# Altium PCB 6S1P-3V-N160铝.PcbDoc
Units mm, origin at the board's own origin, x right, y up, seen from the top; angles counter-clockwise.
Board outline 74.99 x 72.5 mm, 2 copper layers (Top Layer, Bottom Layer); 9 components, 8 nets, 26 pads, 0 vias.
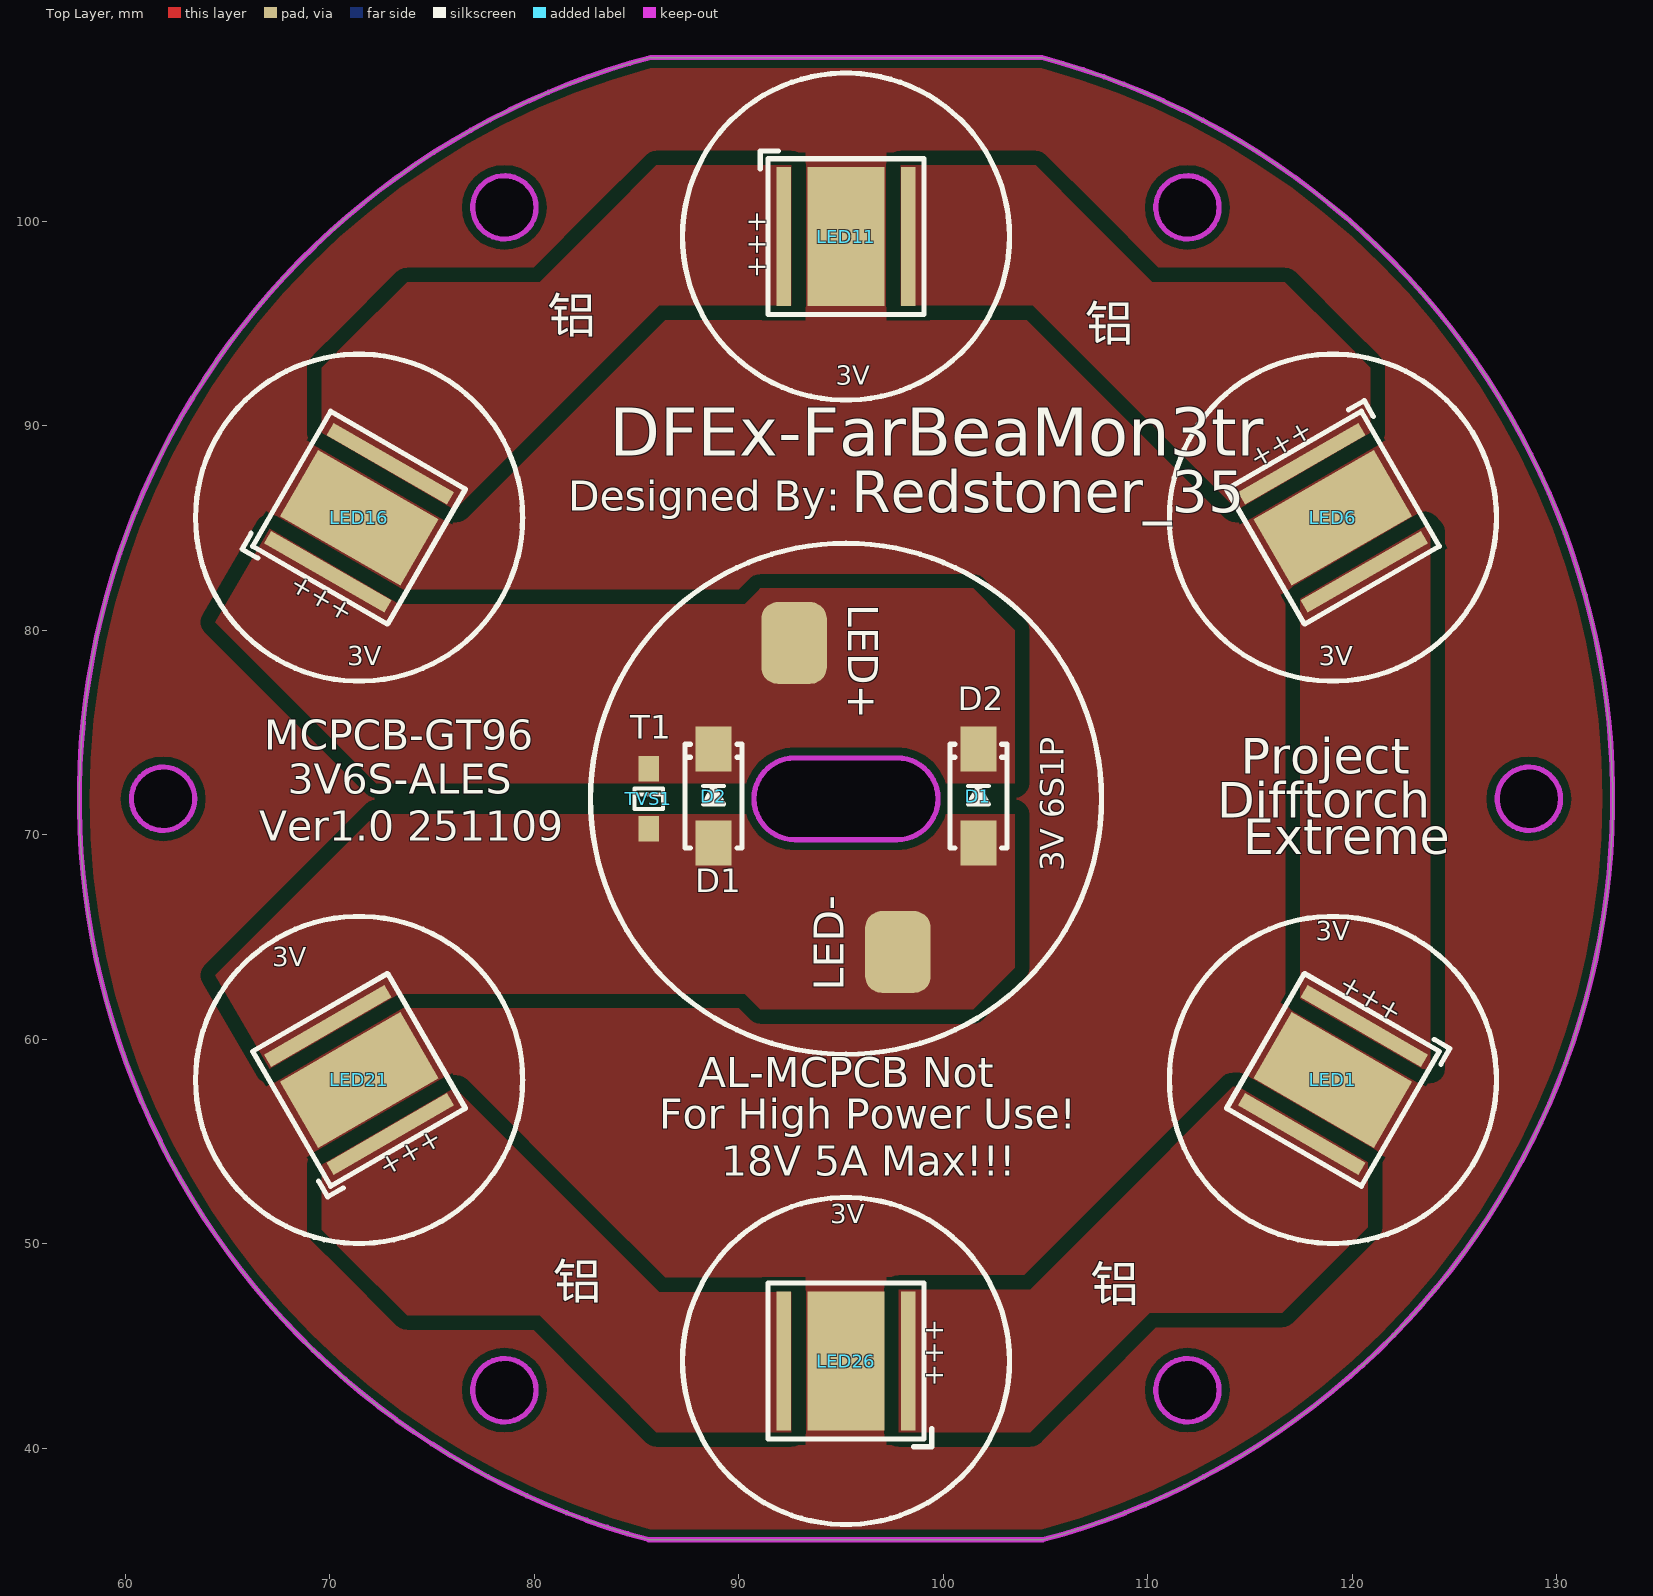
[diagram p0: Top Layer view]
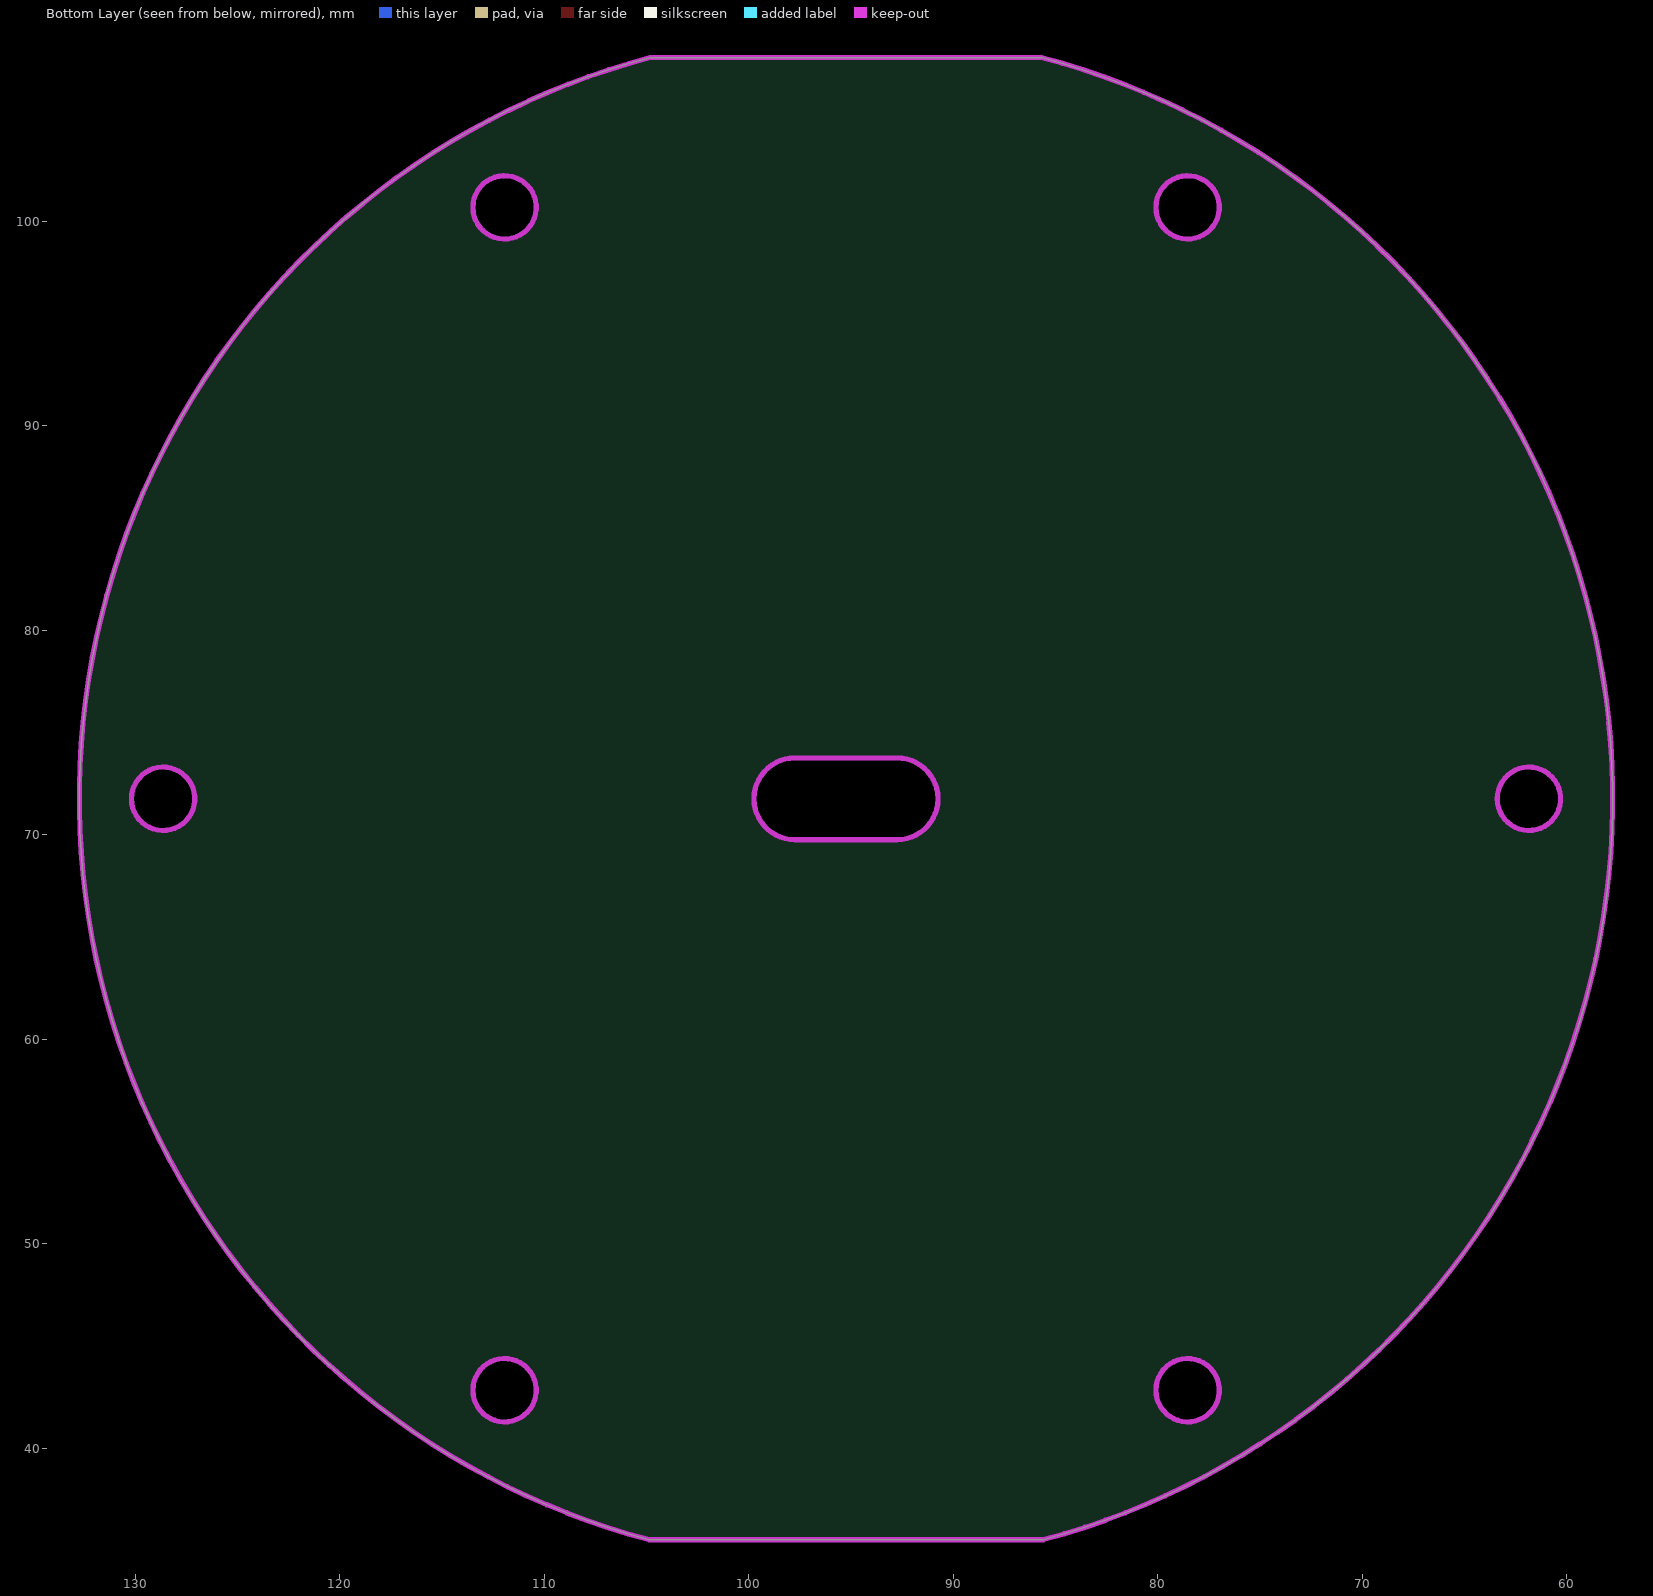
[diagram p1: Bottom Layer view, seen from below]
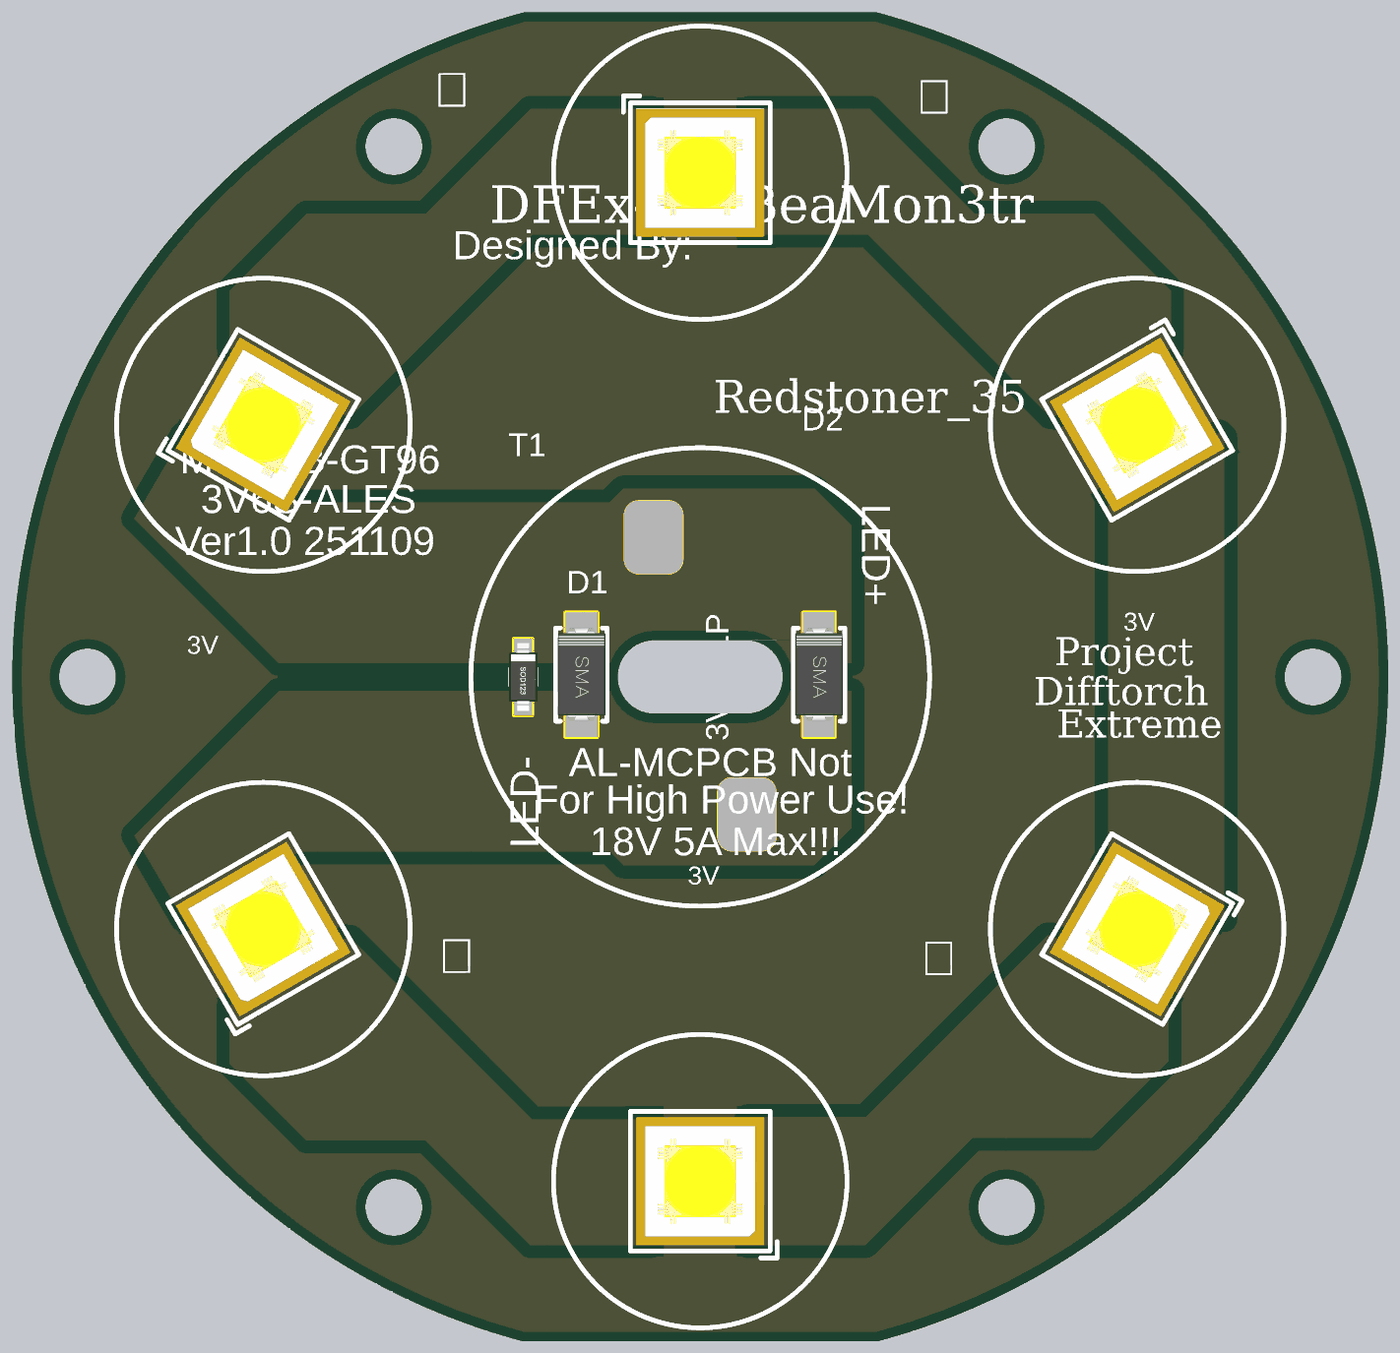
[diagram p2: 3D render of the assembled board from above, using the file's embedded part models]

## Layer stack, top to bottom
Top Solder: solder mask 0.0102, Solder Resist, Dk 3.5
Top Layer: signal copper 0.0356
Dielectric 1: dielectric 0.32, FR-4, Dk 4.8
Bottom Layer: signal copper 0.0356
Bottom Solder: solder mask 0.0102, Solder Resist, Dk 3.5

## Board outline
85.597,35.519 cw(c95.25,71.755) 85.7,108.019 85.7,108.01 104.832,108.01 cw(c95.25,71.755) 104.888,35.515
cut-out: 76.999,42.828 cw(c78.549,42.828) 78.549,44.378 cw(c78.549,42.828) 80.099,42.828 cw(c78.549,42.828) 78.549,41.278 cw(c78.549,42.828)
cut-out: 110.401,42.828 ccw(c111.951,42.828) 111.951,41.278 ccw(c111.951,42.828) 113.501,42.828 ccw(c111.951,42.828) 111.951,44.378 ccw(c111.951,42.828)
cut-out: 127.102,71.755 ccw(c128.652,71.755) 128.652,70.205 ccw(c128.652,71.755) 130.202,71.755 ccw(c128.652,71.755) 128.652,73.305 ccw(c128.652,71.755)
cut-out: 110.401,100.682 ccw(c111.951,100.682) 111.951,99.132 ccw(c111.951,100.682) 113.501,100.682 ccw(c111.951,100.682) 111.951,102.232 ccw(c111.951,100.682)
cut-out: 78.549,99.132 cw(c78.549,100.682) 76.999,100.682 cw(c78.549,100.682) 78.549,102.232 cw(c78.549,100.682) 80.099,100.682 cw(c78.549,100.682)
cut-out: 61.848,70.205 cw(c61.848,71.755) 60.298,71.755 cw(c61.848,71.755) 61.848,73.305 cw(c61.848,71.755) 63.398,71.755 cw(c61.848,71.755)
cut-out: 92.75,69.755 97.75,69.755 ccw(c97.75,71.755) 97.75,73.755 92.75,73.755 ccw(c92.75,71.755)

## Design rules (kind name [scope] priority, off if disabled: settings)
Clearance Clearance_1 [InNet('LEDH') vs InNetClass('LEDP')] p1: gap=0.7
Clearance [All] p2: gap=0.381
PolygonConnect [All] p1: connectstyle=Direct reliefconductorwidth=0.254 reliefentries=4 polygonreliefangle="90 Angle" airgapwidth=0.254
RoutingVias [All] p1: holewidth=0.711 width=1.27 viastyle="Through Hole" minholewidth=0.711 minwidth=1.27 maxholewidth=0.711 maxwidth=1.27
SolderMaskExpansion [All] p1: expansion=0.102
Width [All] p1: maxlimit=0.254 minlimit=0.254 preferedwidth=0.254
30 further rules are at their usual default settings.

## Classes and differential pairs
net class LEDP: 3V 6V 9V 12V 15V 18V GND

## Components (designator, comment, footprint, x,y, rotation, side; value= is the part's Value field where it differs from the comment)
D1 "SS54" SMA 101.727,71.882 r90 top
D2 "SS54" SMA 88.773,71.882 r90 top
LED1 "FV7012I" NBT160-7070-OLD 119.066,58.005 r60 top
LED6 "FV7012I" NBT160-7070-OLD 119.066,85.505 r120 top
LED11 "FV7012I" NBT160-7070-OLD 95.25,99.255 r180 top locked
LED16 "FV7012I" NBT160-7070-OLD 71.434,85.505 r240 top locked
LED21 "FV7012I" NBT160-7070-OLD 71.434,58.005 r300 top
LED26 "FV7012I" NBT160-7070-OLD 95.25,44.255 r0 top locked
TVS1 "SMF24CA" SOD-123 85.598,71.755 r270 top

## Footprints (in the part's own frame and the unit in brackets; to place one, negate y for a bottom-side part, rotate by r counter-clockwise, add the part's x,y. Pads: shape width x height; smd on the part's side, far side on the other; paste and mask are expansions set on the pad)
NBT160-7070-OLD [mm] "逸尘NBT160-旧版本热焊盘"
  rect 3.75x6.8 smd mask+0.03: 0(0,0)
  rect 0.7x6.8 smd mask+0.03: 1(-3.05,0) 2(3.05,0)
  silkscreen extent -3.81,-4.19 4.19,3.81, body extent -3.5,-3.51 3.5,3.49, height 1.02
SMA [mm] "4.5x2.6*2.2mm（长宽高，不包括引脚）"
  rect 2.2x1.75 smd: 1(-2.3,0) 2(2.3,0)
  silkscreen extent -2.54,-1.4 2.54,1.4, body extent -2.53,-1.3 2.58,1.3, height 2.15
SOD-123 [mm]
  rect 1.25x1 smd: 1(1.475,0) 2(-1.475,0)
  silkscreen extent -0.5,-0.7 0.5,0.7, body extent -1.85,-0.77 1.85,0.78, height 1.35

## Free pads (board coordinates)
  rrect50% 3.2x4 smd mask+0.03: 1(92.71,79.375) 1(97.79,64.262)

## Nets (pads, with @x,y where several pads share a name; then routed paths per layer and width w, separated by ;. In a path a pad name is that pad's centre, name@x,y a point inside that pad or via, vN(x,y) a via of type N, cw(c..) or ccw(c..) an arc to the next point about the centre after c; other vN are vias at no path point)
3V: LED21.2 LED26.1
6V: LED1.1 LED26.2
9V: LED1.2 LED6.1
12V: LED6.2 LED11.1
15V: LED11.2 LED16.1
18V: D1.2 D2.2 LED16.2 pad.1@92.71,79.375 TVS1.2
GND: D1.1 D2.1 LED21.1 pad.1@97.79,64.262 TVS1.1
LEDH: LED1.0 LED6.0 LED11.0 LED16.0 LED21.0 LED26.0

## Polygon pours and split planes (outlines as drawn)
LEDH on Top Layer "Component Side-No Net 1" (solid, remove dead copper, pour order 31): 44.196,26.289 45.212,25.273 157.226,25.273 157.226,116.84 146.812,127.254 145.796,128.27 22.987,128.27
9V on Top Layer "Component Side-No Net 1" (solid, remove dead copper, pour order 29): 117.475,81.534 117.475,61.976 123.444,58.547 123.825,58.547 123.825,84.836 123.571,85.09
15V on Top Layer "Component Side-No Net 1" (solid, remove dead copper, pour order 24): 92.583,102.743 92.583,95.885 86.106,95.885 82.296,92.075 76.2,85.979 76.073,85.979 75.946,85.979 69.596,89.662 69.596,92.837 69.85,93.091 70.866,94.107 73.787,97.028 78.74,97.028 80.264,97.028 83.439,100.203 85.979,102.743 88.138,102.743
12V on Top Layer "Component Side-No Net 1" (solid, remove dead copper, pour order 24): 97.917,102.743 97.917,95.885 104.394,95.885 108.204,92.075 114.3,85.979 114.427,85.979 114.554,85.979 120.904,89.662 120.904,92.837 120.65,93.091 119.634,94.107 116.713,97.028 111.76,97.028 110.236,97.028 107.061,100.203 104.521,102.743 102.362,102.743
6V on Top Layer "Component Side-No Net 1" (solid, remove dead copper, pour order 24): 97.79,40.767 97.79,47.752 104.267,47.752 108.077,51.562 114.173,57.658 114.3,57.658 114.427,57.658 120.777,53.975 120.777,50.8 120.523,50.546 119.507,49.53 116.586,46.609 111.633,46.609 110.109,46.609 106.934,43.434 104.394,40.894 104.267,40.767
3V on Top Layer "Component Side-No Net 1" (solid, remove dead copper, pour order 24): 92.583,40.767 92.583,47.625 86.106,47.625 82.296,51.435 76.2,57.531 76.073,57.531 75.946,57.531 69.596,53.848 69.596,50.673 69.85,50.419 70.866,49.403 73.787,46.482 78.74,46.482 80.264,46.482 83.439,43.307 85.979,40.767 88.138,40.767
GND on Top Layer "Component Side-No Net 1" (solid, remove dead copper, pour order 21): 67.056,58.547 73.394,62.23 90.297,62.23 90.932,61.595 91.059,61.468 99.314,61.468 101.473,61.468 102.87,62.865 103.505,63.5 103.505,70.993 85.344,70.993 85.09,70.993 75.565,70.993 72.263,70.993 64.389,63.119
18V on Top Layer "Component Side-No Net 1" (solid, remove dead copper, pour order 21): 67.056,84.963 73.394,81.28 90.297,81.28 90.932,81.915 91.059,82.042 99.314,82.042 101.473,82.042 102.87,80.645 103.505,80.01 103.505,72.517 85.344,72.517 85.09,72.517 75.565,72.517 72.263,72.517 64.389,80.391

## Keep-outs
Keep-Out Layer:
  circle w0.254: c128.652,71.755 r1.55
  circle w0.254: c111.951,42.828 r1.55
  circle w0.254: c78.541,42.828 r1.55
  circle w0.254: c61.848,71.755 r1.55
  circle w0.254: c78.541,100.682 r1.55
  circle w0.254: c111.951,100.682 r1.55
  lines w0.254: 85.597,35.515 104.888,35.515 ccw(c95.25,71.755) 104.832,108.01 85.7,108.01 ; 85.597,35.519 cw(c95.25,71.755) 85.7,108.019 ; 92.75,69.755 cw(c92.75,71.755) 92.75,73.755 97.75,73.755 cw(c97.75,71.755) 97.75,69.755 92.75,69.755

## Silkscreen, mask and mechanical layers (free items; w line width, h text height)
Top Overlay:
  circle w0.254: c95.25,71.755 r12.5
  circle w0.254: c71.434,85.505 r8
  circle w0.254: c71.434,58.005 r8
  circle w0.254: c95.25,44.255 r8
  circle w0.254: c119.066,58.005 r8
  circle w0.254: c119.066,85.505 r8
  circle w0.254: c95.25,99.255 r8
  text "铝" at 80.645,93.98 h3
  text "铝" at 106.934,93.599 h3
  text "3V" at 94.742,91.694 h1.6
  text "DFEx-FarBeaMon3tr" at 83.693,87.757 h4
  text "Designed By:" at 81.661,85.344 h2.5
  text "Redstoner_35" at 95.504,85.09 h3.5
  text "LED+" at 94.869,81.28 h2.5 r270
  text "3V" at 70.866,77.978 h1.6
  text "3V" at 118.364,77.978 h1.6
  text "D2" at 100.711,75.692 h2
  text "T1" at 84.709,74.295 h2
  text "MCPCB-GT96" at 66.802,73.66 h2.5
  text "Project" at 114.554,72.39 h3
  text "3V6S-ALES" at 67.945,71.501 h2.5
  text "Difftorch" at 113.411,70.231 h3
  text "Ver1.0 251109" at 66.548,69.215 h2.5
  text "Extreme" at 114.681,68.453 h3
  text "3V 6S1P" at 106.299,68.199 h2 r90
  text "D1" at 87.884,66.802 h2
  text "3V" at 118.237,64.516 h1.6
  text "3V" at 67.183,63.246 h1.6
  text "LED-" at 95.631,62.357 h2.5 r90
  text "AL-MCPCB Not" at 88.011,57.15 h2.5
  text "For High Power Use!" at 86.106,55.118 h2.5
  text "18V 5A Max!!!" at 89.154,52.832 h2.5
  text "3V" at 94.488,50.673 h1.6
  text "铝" at 80.899,46.736 h3
  text "铝" at 107.188,46.609 h3
Mechanical 1:
  circle w0.254: c78.549,42.828 r3.2
  circle w0.254: c111.951,42.828 r3.2
  circle w0.254: c111.951,100.682 r3.2
  circle w0.254: c78.549,100.682 r3.2
  circle w0.254: c61.848,71.755 r3.2
  circle w0.254: c128.652,71.755 r3.2

## Text inside footprints (layer, text, board x,y; h text height)
LED1: Top Overlay "+++" at 122.706,61.769 h1.65 r150
LED6: Top Overlay "+++" at 117.626,90.539 h1.65 r210
LED11: Top Overlay "+++" at 90.17,100.525 h1.65 r270
LED16: Top Overlay "+++" at 67.794,81.741 h1.65 r330
LED21: Top Overlay "+++" at 72.874,52.971 h1.65 r30
LED26: Top Overlay "+++" at 100.33,42.985 h1.65 r90